# Altium PCB emu.PcbDoc
Units mil, origin at the board's own origin, x right, y up, seen from the top; angles counter-clockwise.
Board outline 1983.53 x 1978.53 mil, 2 copper layers (Top Layer, Bottom Layer); 25 components, 15 nets, 66 pads, 0 vias.
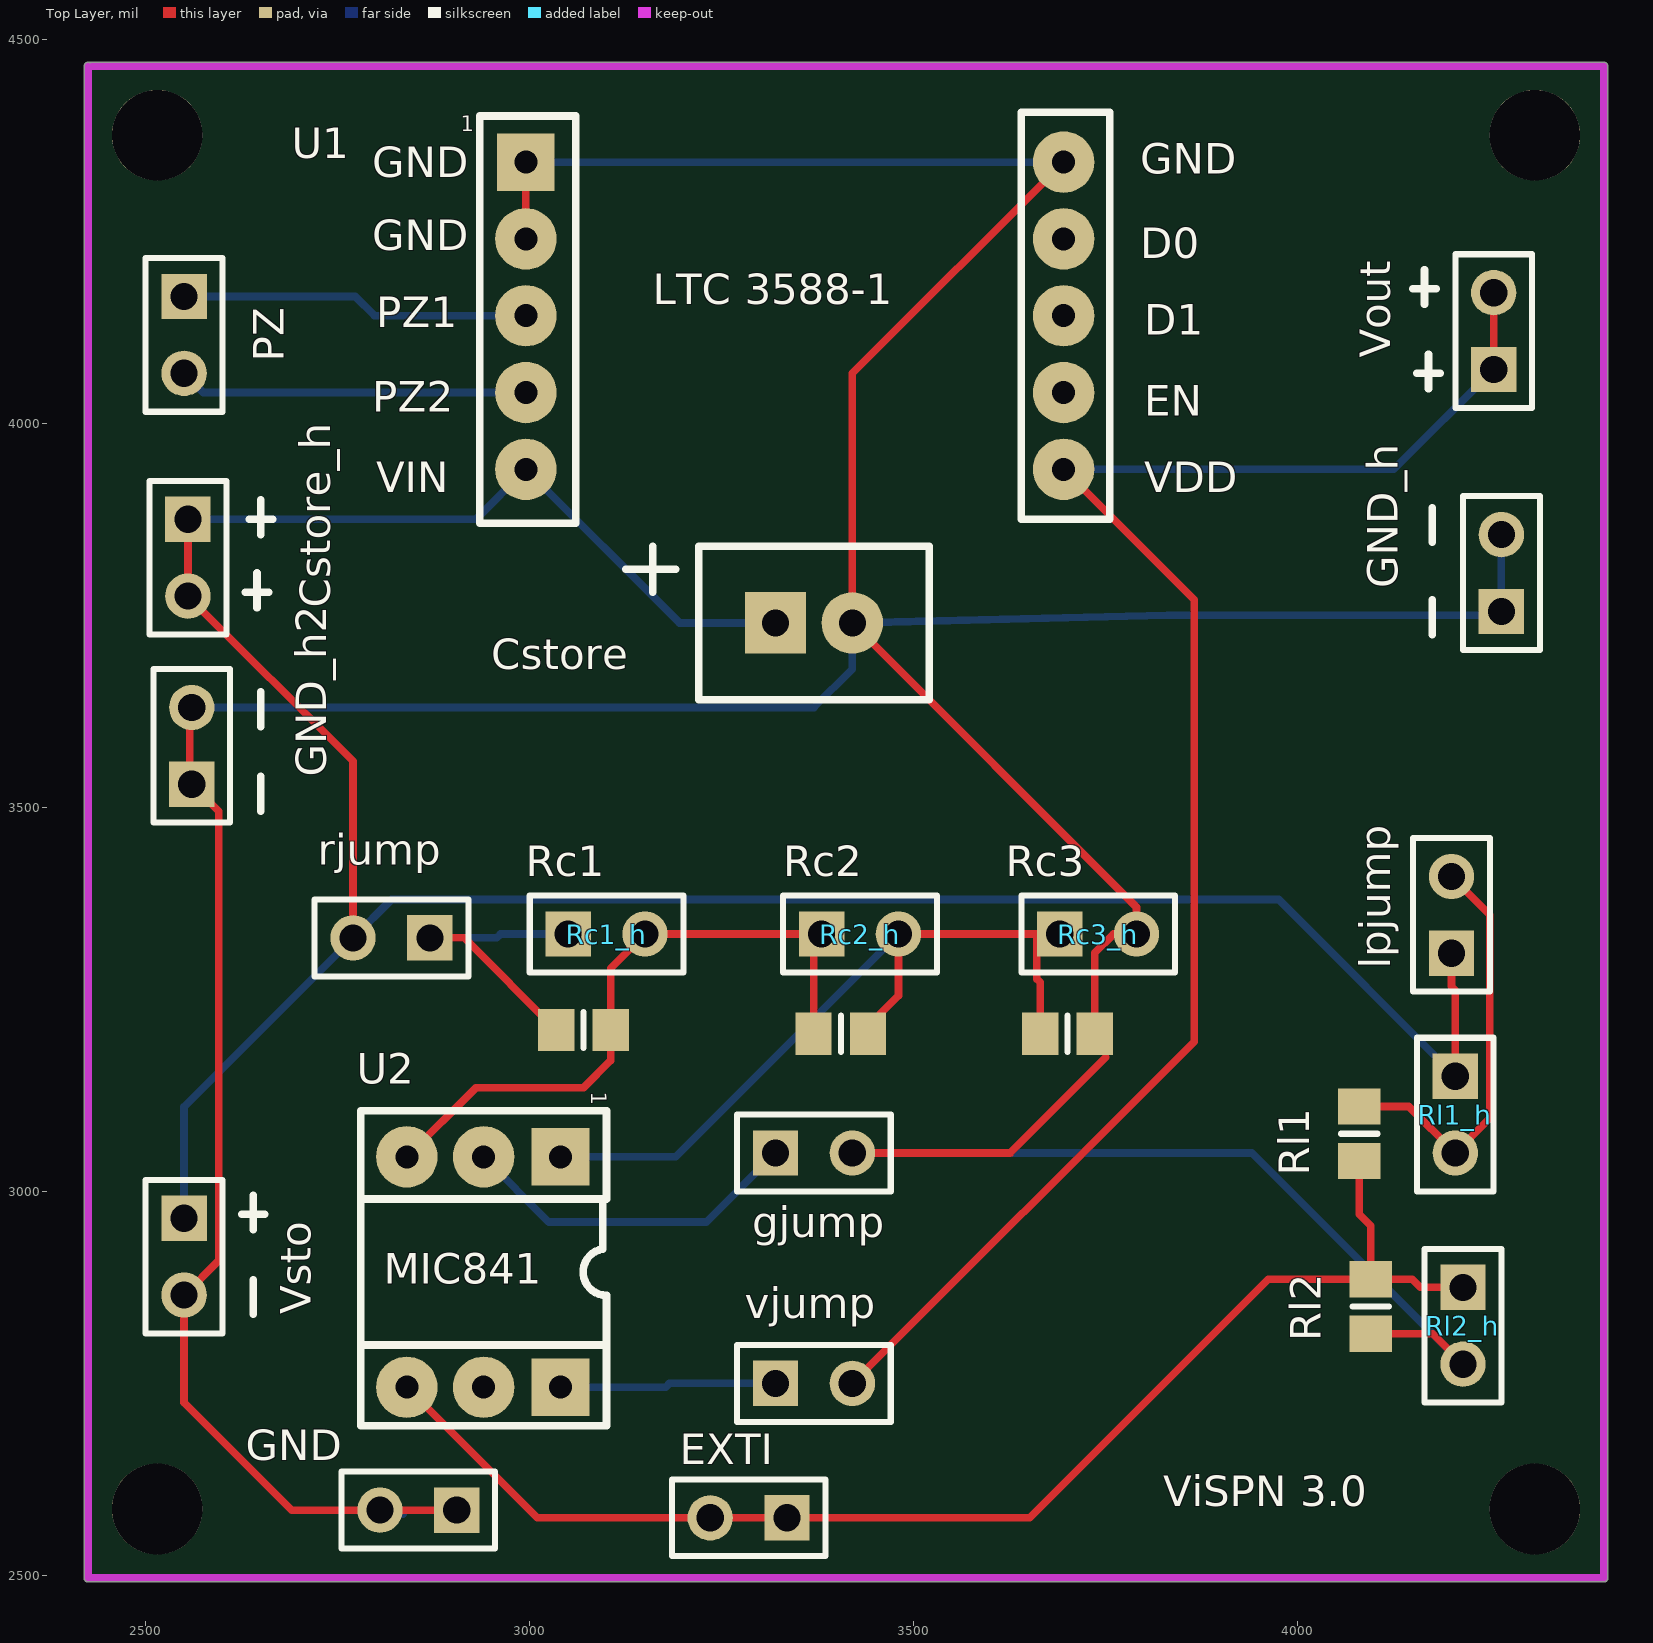
[diagram p0: Top Layer view]
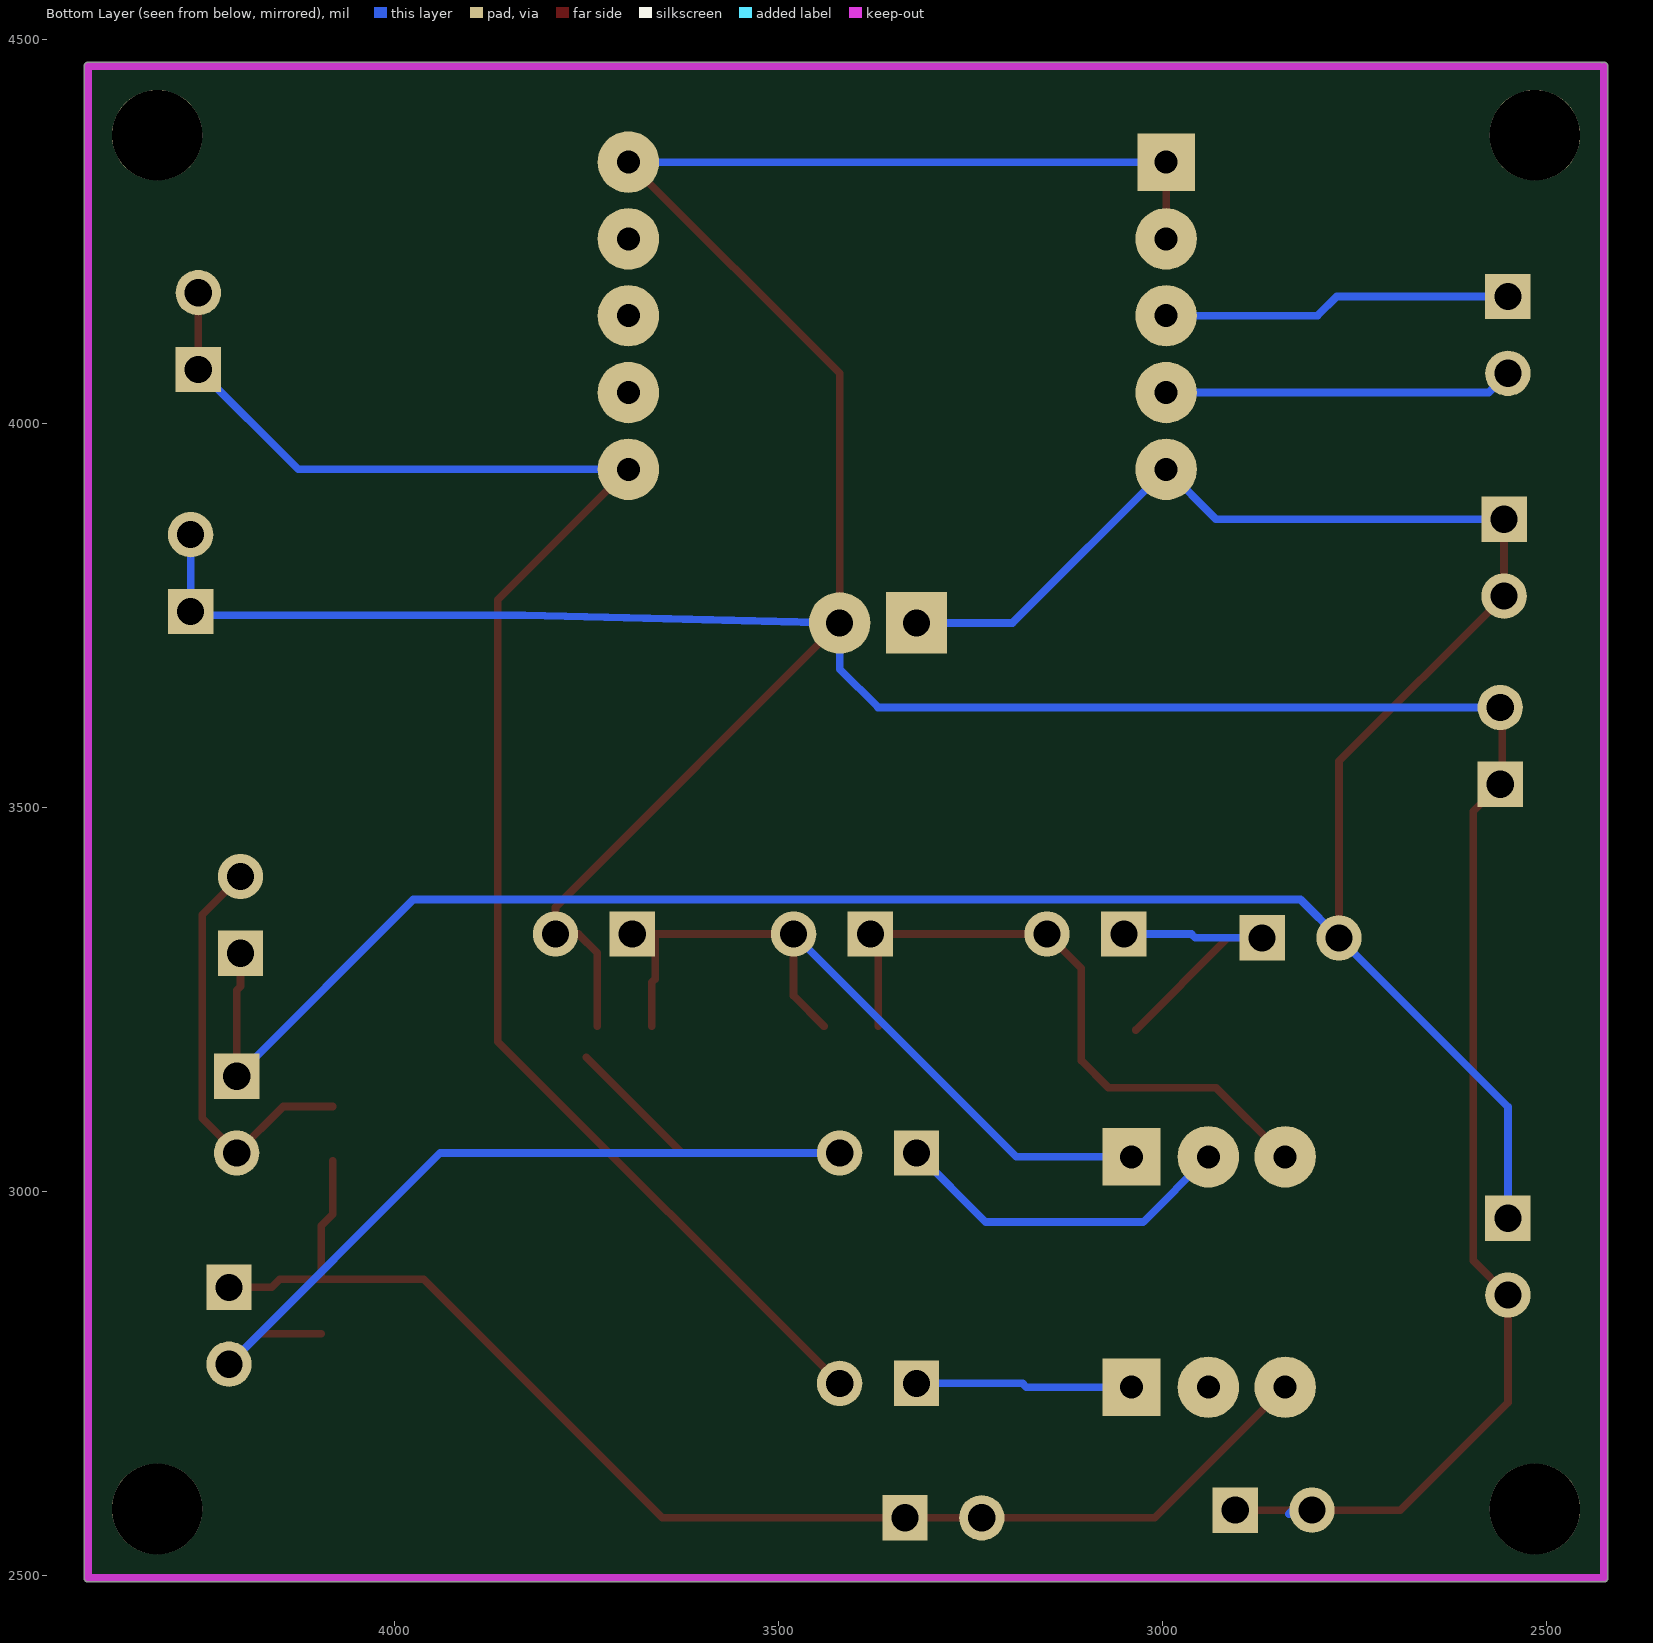
[diagram p1: Bottom Layer view, seen from below]

## Layer stack, top to bottom
Top Solder: solder mask 0.4, Solder Resist, Dk 3.5
Top Layer: signal copper 1.4
Dielectric1: dielectric 12.6, FR-4, Dk 4.8
Bottom Layer: signal copper 1.4
Bottom Solder: solder mask 0.4, Solder Resist, Dk 3.5

## Board outline
2425,2491.5 cw(c2425,2496.52) 2419.99,2496.52 2419.99,4465.02 cw(c2425,4465.02) 2427.52,4469.36 cw(c2430,4465) 2430,4470.02 4398.06,4470.02 cw(c4398.5,4465.02) 4403.52,4465.02 4403.52,2496.52 cw(c4398.5,2496.52) 4398.5,2491.5

## Design rules (kind name [scope] priority, off if disabled: settings)
Clearance [All] p1: gap=10 ignorepadtopadclearanceinfootprint=FALSE except(0: Arc-Hole Track-Hole SMDPad-Hole THPad-Hole Via-Hole Fill-Hole Poly-Hole Region-Hole Text-Hole)
PolygonConnect [All] p1: connectstyle=Relief reliefconductorwidth=10 reliefentries=4 polygonreliefangle="90 Angle" airgapwidth=10
RoutingVias [All] p1: holewidth=28 width=50 viastyle="Through Hole" minholewidth=28 minwidth=50 maxholewidth=28 maxwidth=50
SolderMaskExpansion [All] p1: expansion=4
Width [All] p1: maxlimit=10 minlimit=10 preferedwidth=10
30 further rules are at their usual default settings.

## Components (designator, comment, footprint, x,y, rotation, side; value= is the part's Value field where it differs from the comment)
Cstore "Cap Pol1" 直插电容 3320,3740 r0 top
Cstore_h "Header 2" HDR1X2 2555,3875 r270 top
EXTI "Header 2" HDR1X2 3335,2575 r180 top
gjump "Header 2" HDR1X2 3320,3050 r0 top
GND "Header 2" HDR1X2 2905,2585 r180 top (schematic designator GND2)
GND_h "Header 2" HDR1X2 4265,3755 r90 top
GND_h2 "Header 2" HDR1X2 2560,3530 r90 top
lpjump "Header 2" HDR1X2 4200,3310 r90 top
PZ "Header 2" HDR1X2 2550,4165 r270 top
Rc1 "Res1" 6-0805_N 3070,3210 r180 top
Rc1_h "Header 2" HDR1X2 3050,3335 r0 top
Rc2 "Res1" 6-0805_N 3405,3205 r180 top
Rc2_h "Header 2" HDR1X2 3380,3335 r0 top
Rc3 "Res1" 6-0805_N 3700,3205 r180 top
Rc3_h "Header 2" HDR1X2 3690,3335 r0 top
rjump "Header 2" HDR1X2 2870,3330 r180 top
Rl1 "Res1" 6-0805_N 4080,3075 r90 top
Rl1_h "Header 2" HDR1X2 4205,3150 r270 top
Rl2 "Res1" 6-0805_N 4095,2850 r90 top
Rl2_h "Header 2" HDR1X2 4215,2875 r270 top
U1 "Header 5X2A" ltc3588 3695,4340 r270 top
U2 "MIC841" mic841 3040,3045 r180 top
vjump "Header 2" HDR1X2 3320,2750 r0 top
Vout "Header 2" HDR1X2 4255,4070 r90 top
Vsto "Header 2" HDR1X2 2550,2965 r270 top (schematic designator VSTO)

## Footprints (in the part's own frame and the unit in brackets; to place one, negate y for a bottom-side part, rotate by r counter-clockwise, add the part's x,y. Pads: shape width x height; smd on the part's side, far side on the other; paste and mask are expansions set on the pad)
6-0805_N [mm] "Chip Resistor, Body 2.0x1.2mm, IPC Medium Density"
  rect 1.2x1.4 smd: 1(-0.9,0) 2(0.9,0)
  silkscreen extent 0,-0.6 0,0.6, body extent -1.07,-0.7 1.07,0.7, height 0.7
HDR1X2 [mm] "Connector; Header; 2 Position"
  rect 1.5x1.5 hole 0.9: 1(0,0)
  round 1.5 hole 0.9: 2(2.54,0)
  silkscreen extent -1.27,-1.27 3.81,1.27
ltc3588 [mil]
  rect 75x75 hole 30: 1(0,-700)
  round 80 hole 30: 2(100,-700) 3(200,-700) 4(300,-700) 5(400,-700) 6(0,0) 7(100,0) 8(200,0) 9(300,0) 10(400,0)
  silkscreen extent -65,-760 470,60
mic841 [mil]
  round 80 hole 30: 0(100,300) 2(100,0) 3(200,0) 4(200,300)
  rect 75x75 hole 30: 1(0,0) 5(0,300)
  silkscreen extent -60,-60 260,350
直插电容 [mil]
  rect 80x80 hole 35: 1(0,0)
  round 80 hole 35: 2(100,0)
  silkscreen extent -195,-100 200,100

## Part data
Cstore: "Polarized Capacitor (Radial)"
Cstore_h EXTI gjump GND GND_h GND_h2 lpjump PZ Rc1_h Rc2_h Rc3_h rjump Rl1_h Rl2_h vjump Vout Vsto: "Header, 2-Pin"
Rc1 Rc2 Rc3 Rl1 Rl2: "Resistor"
U1: "Header, 5-Pin, Dual row"
U2: library part Component_1

## Free pads (board coordinates)
  round 118.11 hole 118.11: 4(2515,4375) 5(4308.53,4375) 6(2515,2586.52) 7(4308.5,2586.52)

## Nets (pads, with @x,y where several pads share a name; then routed paths per layer and width w, separated by ;. In a path a pad name is that pad's centre, name@x,y a point inside that pad or via, vN(x,y) a via of type N, cw(c..) or ccw(c..) an arc to the next point about the centre after c; other vN are vias at no path point)
D0: U1.7
D1: U1.8
EN: U1.9
EXTI: EXTI.1 EXTI.2 Rl1.1 Rl2.2 Rl2_h.1 U2.4 | length 1738.7
  Top Layer w10: U2.4 3010,2575 EXTI.2 EXTI.1 3651,2575 3961.43,2885.43 Rl2.2 ; Rl1.1 4080,2970 4095,2955 Rl2.2 ; Rl2_h.1 4159.43,2875 4149,2885.43 Rl2.2
GND: Cstore.2 gjump.2 GND.1 GND.2 GND_h2.1 GND_h2.2 GND_h.1 GND_h.2 Rc3.1 Rc3_h.2 Rl2.1 Rl2_h.2 U1.1 U1.2 U1.6 Vsto.2 | length 6895.1
  Top Layer w10: GND_h2.2 2557.55,3627.55 2557.55,3532.45 GND_h2.1 2595,3495 2595,2910 Vsto.2 2550,2725 2690,2585 GND.2 GND.1 ; U1.2 U1.1 ; gjump.2 3625.43,3050 3750,3174.57 ; U1.6 3420,4065 Cstore.2 3790,3370 Rc3_h.2 ; Rc3.1@3735.43,3215 3735.43,3310.43 3760,3335 ; Rl2.1 4175.43,2814.57 Rl2_h.2
  Bottom Layer w10: GND_h2.2 3370,3630 3420,3680 Cstore.2 3829.88,3749.92 4259.92,3749.92 GND_h.1 GND_h.2 ; GND.2@2817.5,2597.5 2835,2580 ; U1.1 U1.6 ; gjump.2 3940,3050 Rl2_h.2
HTH: Rc2.1 Rc2_h.2 Rc3.2 Rc3_h.1 U2.1 | length 998.4
  Top Layer w10: Rc2.1@3440.43,3215 3480,3254.57 Rc2_h.2 3660,3335 3660,3276.57 3664.57,3272 Rc3.2@3664.57,3215
  Bottom Layer w10: U2.1 3190,3045 Rc2_h.2
LPJUMP2: lpjump.2 Rl1.2 Rl1_h.2 | length 549.4
  Top Layer w10: Rl1.2 4144.57,3110.43 Rl1_h.2 4250,3095 4250,3360 lpjump.2
LTH: Rc1.1 Rc1_h.2 Rc2.2 Rc2_h.1 U2.3 | length 854.7
  Top Layer w10: U2.3 2930,3135 3070,3135 3105.43,3170.43 Rc1.1 3105.43,3290.43 Rc1_h.2 Rc2_h.1 3369.57,3324.57 Rc2.2@3369.57,3215
Netgjump_1: gjump.1 U2.2 | length 452.5
  Bottom Layer w10: U2.2 3025,2960 3230,2960 gjump.1
NetU2_5: U2.5 vjump.1 | length 282.1
  Bottom Layer w10: U2.5 3177,2745 3182,2750 vjump.1
PZ1: PZ.1 U1.3 | length 455.4
  Bottom Layer w10: PZ.1 2747,4165 2773,4165 2798,4140 U1.3
PZ2: PZ.2 U1.4 | length 455.4
  Bottom Layer w10: PZ.2 2575,4040 U1.4
RJUMP2: Rc1.2 Rc1_h.1 rjump.1 | length 396.3
  Top Layer w10: rjump.1 2914.57,3330 Rc1.2
  Bottom Layer w10: rjump.1 2957,3330 2962,3335 Rc1_h.1
VOUT: U1.10 vjump.2 Vout.1 Vout.2 | length 2158.6
  Top Layer w10: vjump.2 3865,3195 3865,3770 U1.10 ; Vout.1 Vout.2
  Bottom Layer w10: U1.10 4100,3940 4125,3940 Vout.1
VSTO: Cstore.1 Cstore_h.1 Cstore_h.2 lpjump.1 rjump.2 Rl1_h.1 U1.5 Vsto.1 | length 3678
  Top Layer w10: Cstore_h.1 Cstore_h.2 2770,3560 rjump.2 ; lpjump.1 4200,3267 4205,3262 Rl1_h.1
  Bottom Layer w10: Vsto.1 2550,3110 rjump.2 2820,3380 3975,3380 Rl1_h.1 ; Cstore_h.1 2930,3875 U1.5 3195,3740 Cstore.1
pads on no net: U2.0

## Keep-outs
Keep-Out Layer:
  lines w10: 2425,4465.02 2425,2496.52 4398.5,2496.52 4398.5,4465.02 2430,4465

## Silkscreen, mask and mechanical layers (free items; w line width, h text height)
Top Overlay:
  lines w10: 2625,2970 2655,2970 ; 2630,3780 2660,3780 ; 2635,3875 2665,3875 ; 2640,2840 2640,2885 ; 2640,2950 2640,2995 ; 2645,3760 2645,3805 ; 2650,3495 2650,3540 ; 2650,3605 2650,3650 ; 2650,3855 2650,3900 ; 2780,2800 2780,2990 ; 3095,2985 3095,2925 ccw(c3100,2895) 3100,2864.59 3100,2800 ; 4150,4175 4180,4175 ; 4155,4065 4185,4065 ; 4165,4155 4165,4200 ; 4170,4045 4170,4090 ; 4175,3725 4175,3770 ; 4175,3845 4175,3890
  text "GND" at 3795,4325 h40
  text "GND" at 2795,4320 h40
  text "GND" at 2795,4225 h40
  text "D0" at 3795,4215 h40
  text "LTC 3588-1" at 3160,4155 h40
  text "PZ1" at 2800,4125 h40
  text "D1" at 3800,4115 h40
  text "PZ2" at 2795,4015 h40
  text "EN" at 3800,4010 h40
  text "VIN" at 2800,3910 h40
  text "VDD" at 3800,3910 h40
  text "MIC841" at 2810,2880 h40
  text "ViSPN 3.0" at 3825,2590 h40

## Text inside footprints (layer, text, board x,y; h text height)
U1: Top Overlay "1" at 2910,4380 h20
U2: Top Overlay "1" at 3080,3130 h20 r270